# EAGLE board Ariel v5.42 (EAGLE 9.3.0)
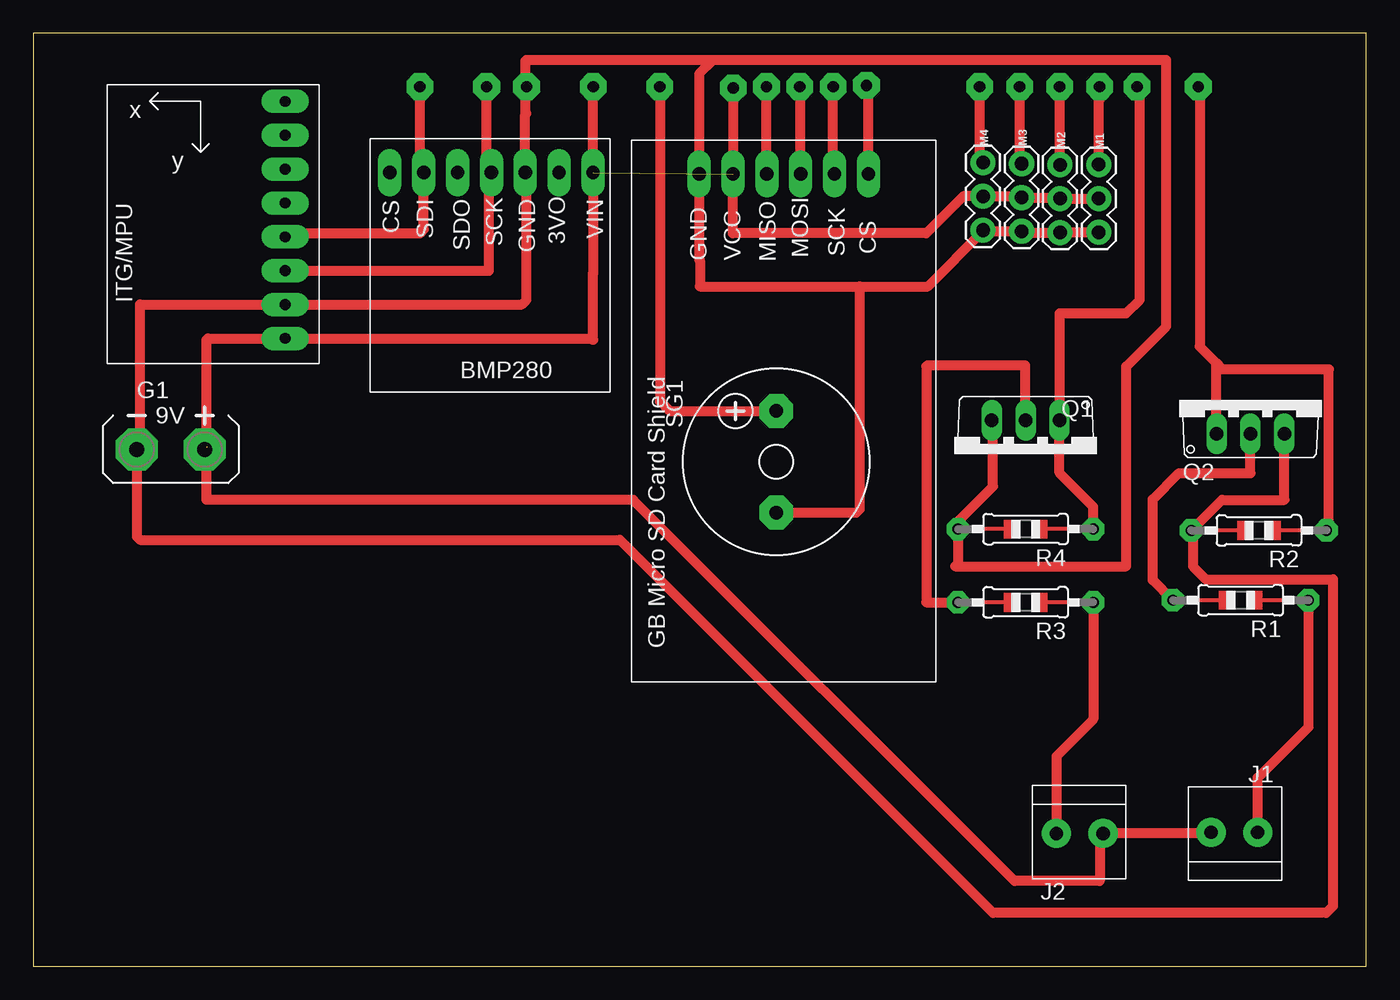
[diagram p0: board, top side]

Size 100 x 70 mm. Coordinates in mm from the lower left corner, seen from the top.
Outline: 0,0 100,0 100,70 0,70 0,0
Copper layers (1*16): Top 0.035mm / dielectric 1.5mm / Bottom 0.035mm
Design rules "default": minimum track width 6mil, minimum drill 0.35mm, track to track 6mil, track to pad 6mil, pad to pad 6mil, via to via 6mil, smd to smd 6mil, copper to edge 40mil, drill to drill 6mil, minimum pad ring 10mil, minimum via ring 8mil, stop-mask expansion 4mil, vias tented up to drill 0mil, thermal gap 10mil
Net classes: 0 default: width 0.75 mm, clearance 0.35 mm

## Footprints (pad centres in the part's own frame; a part is rotated, then mirrored left to right if it is on the bottom)
AB9V = drill 1.118 pad 3.15 octagon: + 0,2.54; - 0,-2.54
1X2-3.5MM = drill 1 pad 2.184: 1 1.8,0; 2 -1.7,0
1X03 = drill 1.016 pad 1.88: 1 0,0; 2 2.54,0; 3 5.08,0
TO220V = drill 1.016 long: 1 -2.54,-2.54; 2 0,-2.54; 3 2.54,-2.54
0805-THM = drill 0.813 pad 1.676 octagon: 1 -5.08,0; 2 5.08,0
F/CM12P = drill 1.016 pad 2.54 octagon: + 3.81,0; - -3.81,0
GY-521 = drill 0.8 pad 1.778 long: ADO -8.89,-6.35; GND -8.89,6.35; INT -8.89,-8.89; SCL -8.89,3.81; SDA -8.89,1.27; VCC -8.89,8.89; XCL -8.89,-3.81; XDA -8.89,-1.27
BMP280 = drill 1 pad 1.778 long: 3VO 3.81,2.54; CS 16.51,2.54; GND 6.35,2.54; SCK 8.89,2.54; SDI 13.97,2.54; SDO 11.43,2.54; VIN 1.27,2.54
GBMICROSDSHIELD = drill 1 pad 1.778 long: CS 38.1,5.08; GND 38.1,17.78; MISO 38.1,12.7; MOSI 38.1,10.16; SCK 38.1,7.62; VCC 38.1,15.24

## Placement (x,y rotation side)
G1  AB9V  [AB9V]  10.31,38.78 270 top
J1  1X2-3.5MM  [1X2-3.5MM]  90.06,10.04 0 top
J2  1X2-3.5MM  [1X2-3.5MM]  78.56,9.96 180 top
M1  SERVO  [1X03]  79.93,60.15 270 top
M2  SERVO  [1X03]  77.03,60.14 270 top
M3  SERVO  [1X03]  74.15,60.22 270 top
M4  SERVO  [1X03]  71.25,60.31 270 top
Q1  [TO220V]  74.45,38.42 180 top
Q2  [TO220V]  91.32,42.48 0 top
R1  1ohm  [0805-THM]  90.58,27.46 180 top
R2  470ohm  [0805-THM]  91.95,32.7 180 top
R3  1ohm  [0805-THM]  74.45,27.3 180 top
R4  470ohm  [0805-THM]  74.45,32.8 180 top
SG1  F/CM12P  [F/CM12P]  55.74,37.85 90 top
U1  GY-521MPU6050  [GY-521]  10,56 180 top
U$2  BMP280  [BMP280]  43.26,62.09 180 top
U$3  GBMICROSDSHIELD  [GBMICROSDSHIELD]  67.73,21.34 90 top

## Library data of the parts
G1 = battery
J1 J2 Q1 Q2 R1-R4 = adafruit
M1-M4 = SparkFun-Electromechanical
SG1 = buzzer; OC_FARNELL: unknown; OC_NEWARK: unknown
U1 = gy-521
U$2 = BMP280
U$3 = GB Micro SD Card Shield

## Nets
BATT: G1.+ J1.2 J2.2 M1.2 M2.2 M3.2 M4.2 U1.VCC U$2.VIN U$3.VCC
BUZZER: SG1.+
CS: U$3.CS
GND: G1.- M1.3 M2.3 M3.3 M4.3 Q1.3 Q2.3 R2.2 R4.2 SG1.- U1.GND U$2.GND U$3.GND
INT: U1.INT
MISO: U$3.MISO
MOSI: U$3.MOSI
N$1: J1.1 R1.1
N$2: Q2.2 R1.2
N$4: J2.1 R3.1
N$5: Q1.2 R3.2
PY1: Q1.1 R4.1
PY2: Q2.1 R2.1
SCK: U$3.SCK
SCL: U1.SCL U$2.SCK
SDA: U1.SDA U$2.SDI
SERVO1: M1.1
SERVO2: M2.1
SERVO3: M3.1
SERVO4: M4.1

## Tracks (layer width: path | path; a pad name or v marks a point on that pad's centre or on a via)
BATT  (via drill 0.85 pad 2)  (2 unrouted)
  Top 0.75: 41.99,52 U$2.VIN v42,66 | 41.99,52 42,52 | M1.2 M2.2 77.03,57.68 M3.2 74.15,57.77 M4.2 69.77,57.77 67,55 52.49,55 U$3.VCC v52.5,65.9 | J1.2 88.28,9.96 J2.2 80,9.7 80,6.39 73.61,6.39 45,35 13,35 13,39 | G1.+ 13,38.93 13,47 13.11,47.11 U1.VCC 41.89,47.11 41.99,47.01 | 42,47 41.99,47.01 | 41.99,47.01 41.99,52
BUZZER  (via drill 0.85 pad 2)
  Top 0.75: SG1.+ 47.74,41.66 47,42.4 v47,66
CS  (via drill 0.85 pad 2)
  Top 0.75: v62.5,66.1 62.65,65.95 U$3.CS
GND  (via drill 0.85 pad 2)
  Top 0.75: 49.95,53 U$3.GND 49.95,66.95 51,68 | 49.95,53 50,53 | M4.3 71.25,55.14 | 71.25,55.14 M3.3 74.15,55.06 M2.3 M1.3 | 49.95,53 50,52.95 50,51 62,51 | 62,51 67.11,51 71.25,55.14 | Q1.3 72,40.87 72,36 69.37,33.37 R4.2 69.37,30.2 69.17,30 82,30 82,45 85,48 85,68 51,68 | Q2.3 93.86,35 89.17,35 R2.2 87,32.57 87,30 87.98,29.02 97.5,29.02 97.5,4.5 97,4 72,4 44,32 8,32 7.77,32.23 G1.- 8,39.01 8,49.65 U1.GND 36.65,49.65 37,50 37,59.55 U$2.GND 36.91,63.91 | SG1.- 61.74,34.04 62,34.3 62,51 | 36.91,63.91 37,64 | 36.91,65.91 36.91,63.91 | v37,66 36.91,65.91 | 51,68 37,68 36.91,67.91 36.91,65.91
MISO  (via drill 0.85 pad 2)
  Top 0.75: U$3.MISO 55,59.44 v55,66
MOSI  (via drill 0.85 pad 2)
  Top 0.75: v57.5,66 57.57,65.93 U$3.MOSI
N$1
  Top 0.75: J1.1 91.86,14.14 95.66,17.94 R1.1
N$2
  Top 0.75: R1.2 83.98,28.98 83.98,35.02 85.96,37 91.32,37 Q2.2
N$4
  Top 0.75: R3.1 79.53,18.53 76.76,15.76 J2.1
N$5
  Top 0.75: R3.2 67,27.3 67,45 67.1,45.1 74.4,45.1 74.4,41.01 Q1.2
PY1  (via drill 0.85 pad 2)
  Top 0.75: R4.1 79.53,34.47 76.99,37.01 Q1.1 77,49 82,49 83,50 83,65.8 v82.8,66
PY2  (via drill 0.85 pad 2)
  Top 0.75: 97,32.73 R2.1 97.2,32.7 97.2,44.78 89.22,44.78 88.72,45.28 | 88.72,45.28 87.5,46.5 87.5,65.9 v87.4,66 | 88.72,45.28 88.72,40 Q2.1
SCK  (via drill 0.85 pad 2)
  Top 0.75: U$3.SCK 60,59.44 v60,66
SCL  (via drill 0.85 pad 2)
  Top 0.75: U1.SCL 34.19,52.19 34.19,59.37 U$2.SCK 34,59.55 v34,66
SDA  (via drill 0.85 pad 2)
  Top 0.75: U1.SDA 19.16,55 29,55 29.29,55.29 U$2.SDI 29,59.55 v29,66
SERVO1  (via drill 0.85 pad 2)
  Top 0.75: M1.1 79.93,65 | 79.93,65 80,65 | 79.93,65 79.93,65.93 v80,66
SERVO2  (via drill 0.85 pad 2)
  Top 0.75: M2.1 77,60.14 v77,66
SERVO3  (via drill 0.85 pad 2)
  Top 0.75: M3.1 74,60.22 v74,66
SERVO4  (via drill 0.85 pad 2)
  Top 0.75: M4.1 71,60.31 v71,66